# Altium PCB PCB_Lampda_2024-07-19.pcbdoc (part 2 of 2)
Units mil, origin at the board's own origin, x right, y up, seen from the top; angles counter-clockwise.
Board outline 2732.28 x 2742.31 mil, 2 copper layers (Top Layer, Bottom Layer); 110 components, 107 nets, 461 pads, 275 vias.
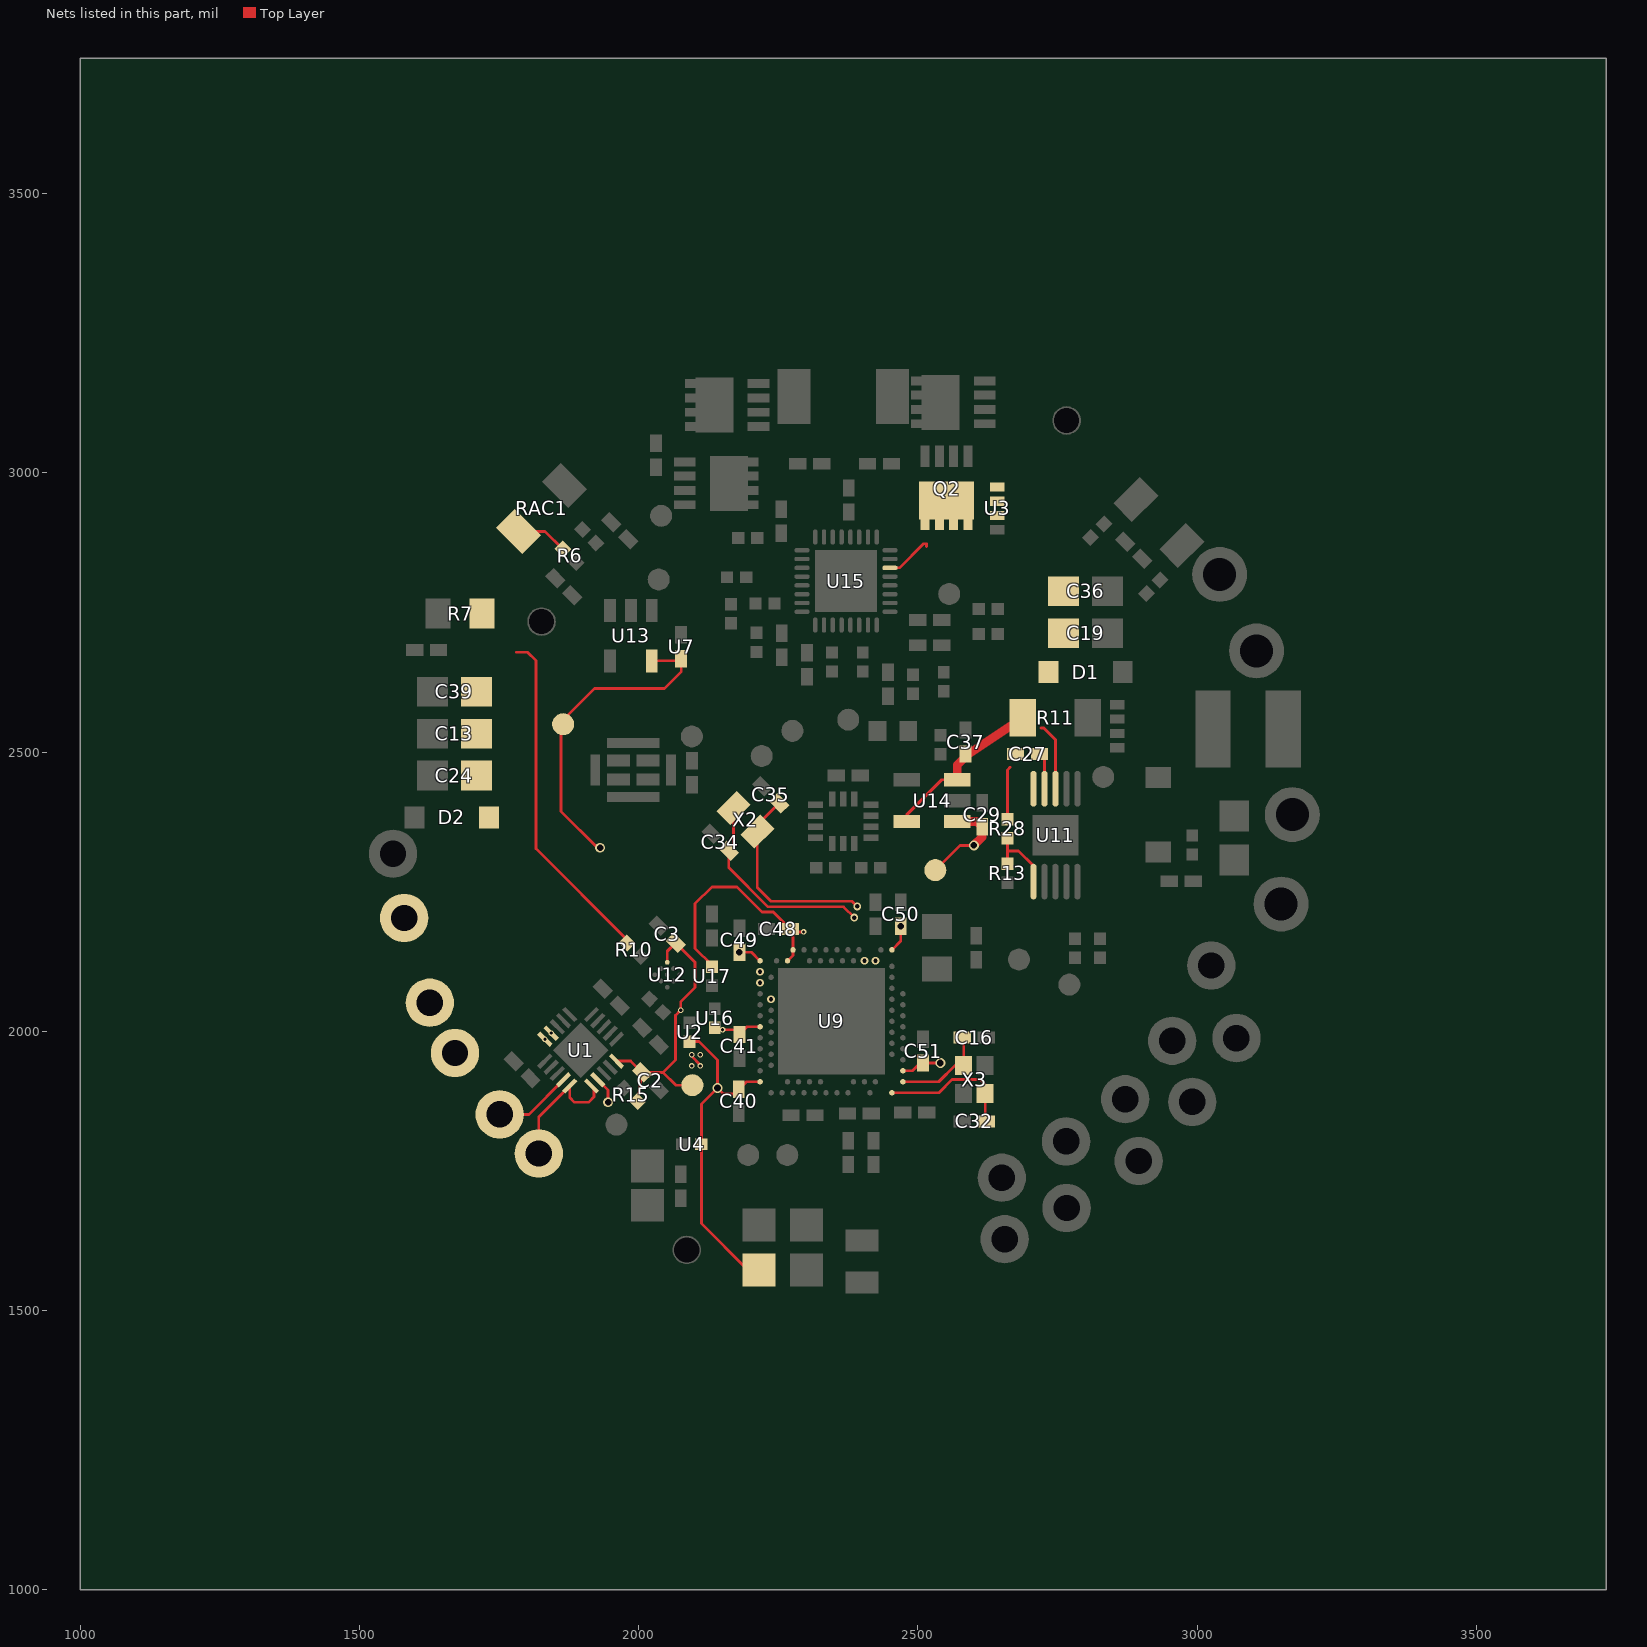
[diagram p2: the nets of this part, all layers, seen from the top]

## Via types
v1: diameter 17.72, hole 11.81, Top Layer to Bottom Layer, tented both sides, 203 vias
v2: diameter 13.78, hole 7.87, Top Layer to Bottom Layer, tented both sides, 35 vias
v3: diameter 9.84, hole 5.91, Top Layer to Bottom Layer, tented both sides, 34 vias
v4: diameter 98.43, hole 59.06, Top Layer to Bottom Layer, tented both sides, 2 vias
v5: diameter 9.84, hole 7.87, Top Layer to Bottom Layer, tented both sides, 1 vias

## Nets (pads, with @x,y where several pads share a name; then routed paths per layer and width w, separated by ;. In a path a pad name is that pad's centre, name@x,y a point inside that pad or via, vN(x,y) a via of type N, cw(c..) or ccw(c..) an arc to the next point about the centre after c; other vN are vias at no path point) (continued)
USB_V33: C2.2 C3.1 pad.1@2096.08,1903.58 R15.2 U1.10 U9.AC9 U12.A3 | length 687.8
  Top Layer w5: U1.10@1960.16,1946.68 1985.63,1946.68 C2.2@2005.97,1926.35 ; R15.2@1998.19,1874.12 C2.2@2005.97,1926.35 ; U12.A3@2051.11,2123.47 2051.11,2143.27 C3.1@2066.25,2158.4 2101.07,2123.58 2101.07,2078.58 2075.19,2052.7 v3(2075.19,2037.9) ; v3(2075.19,2037.9) 2066.07,2028.58 2066.07,1948.58 2043.64,1926.37 ; pad.1@2096.08,1903.58 2066.39,1903.58 2043.63,1926.34 ; C2.2@2005.94,1926.37 2043.64,1926.37
  Mid-Layer 2 w5: v3(2075.19,2037.9) 2195.24,2037.87 2214.54,2057.27 v2(2236.92,2057.27)
USBC_CC1: pad.@1751.14,1851.17 U1.4 U1.7 | length 399.9
  Top Layer w5: pad.@1751.14,1851.17 1803.41,1851.17 U1.4@1865.52,1913.28 ; U1.7@1926.76,1913.27 1945.19,1894.83 v1(1945.19,1872.9)
  Mid-Layer 1 w5: pad.@1751.14,1851.17 1752.87,1852.9 1940.19,1852.9 1945.19,1857.9 v1(1945.19,1872.9)
USBC_CC2: pad.@1821.14,1781.17 U1.5 U1.6 | length 237.2
  Top Layer w5: pad.@1821.14,1781.17 1821.14,1846.63 1876.65,1902.14 1876.64,1881.47 1885.14,1872.87 1910.24,1872.87 1920.24,1882.87 1920.24,1897.57 U1.6@1915.64,1902.17
USBC_D+: pad.@1626.14,2051.17 U1.19 U9.AD6 | length 735.6
  Mid-Layer 1 w5: pad.@1626.14,2051.17 1788.87,2051.17 v3(1843.24,1996.8) ; v3(1843.24,1996.8) 1917.14,1922.87 2090.24,1922.87 2095.24,1927.87 v3(2095.19,1937.9) ; v3(2110.24,1957.87) 2110.24,1982.87 2214.04,2086.77 v2(2217.24,2086.8)
  Mid-Layer 2 w5: v3(2095.19,1937.9) 2095.19,1940.42 2110.24,1955.47 v3(2110.24,1957.87)
USBC_D-: pad.@1671.14,1961.17 U1.20 U9.AD4 | length 791.7
  Top Layer w5: v3(2095.19,1957.9) 2095.19,1954.88 2110.19,1939.88 v3(2110.19,1937.9)
  Mid-Layer 1 w5: pad.@1671.14,1961.17 1671.14,1998.85 1705.19,2032.9 1784.87,2032.9 v3(1832.11,1985.66) 1909.87,1907.9 2095.19,1907.9 2110.19,1922.9 v3(2110.19,1937.9) ; v3(2095.19,1957.9) 2095.24,1984.47 2192.54,2081.77 2201.07,2098.58 2206.07,2103.58 v2(2217.24,2106.48)
USBC_PVBUS: C13.2 C24.2 C39.2 D2.1 pad.@1580.19,2202.9 R6.2 R7.1 R10.1 RAC1.1 | length 706.4
  Top Layer w5: 1781.07,2678.58 1801.07,2678.58 1816.07,2663.58 1816.07,2327.02 1979.09,2164 R10.1@1979.09,2158.22 ; RAC1.1@1784.97,2895.01 1832.31,2895 R6.2@1864.09,2863.22
UVLO: R13.2 R28.2 U11.1 | length 131.7
  Top Layer w5: R13.2@2660.19,2299.94 R28.2@2660.19,2345.86 ; 2660.19,2322.9 2680.19,2322.9 2706.77,2296.32 U11.1@2706.77,2268.1
V33: C29.2 C40.1 C41.2 C48.1 C50.2 C51.1 pad.1@2215.19,1572.9 pad.1@2531.07,2288.58 U2.2 U4.2 U9.A22 U9.AD14 U9.AD23 U9.B1 U9.W1 U9.Y2 U14.1 U16.2 U17.1 | length 2624.1
  Top Layer w5: U2.2@2091.07,1981.54 2108.11,1981.54 2141.07,1948.58 v1(2141.07,1898.58) ; U4.2@2112.23,1797.9 2112.24,1655.87 2195.24,1572.87 pad.1@2215.19,1572.9 ; U4.2@2112.23,1797.9 2112.23,1869.74 v1(2141.07,1898.58) ; U17.1@2131.04,2115.57 2131.04,2118.57 2101.04,2148.57 2101.04,2228.57 2131.04,2258.57 2176.04,2258.57 2221.04,2213.57 2240.94,2213.57 C48.1@2271.65,2182.9 2276.24,2182.87 2276.24,2154.97 U9.W1@2276.24,2145.87 ; U16.2@2136.07,2006.54 2139.71,2002.9 v3(2150.19,2002.9) ; v3(2150.19,2002.9) 2180.24,2002.87 C41.2@2180.19,1994.36 ; C40.1@2179.24,1896.09 2179.24,1887.87 2151.78,1887.87 v1(2141.07,1898.58) ; C40.1@2179.24,1896.09 2192.78,1909.63 U9.AD23@2217.24,1909.63 ; C41.2@2180.19,1994.36 2193.89,2008.06 U9.AD14@2217.24,2008.06 ; U9.Y2@2266.45,2126.17 2276.29,2136.01 U9.W1@2276.29,2145.85 ; C48.1@2271.65,2182.9 2276.65,2177.9 v3(2295.19,2177.9) ; U9.B1@2453.46,2145.85 2469.24,2161.63 v1(2469.24,2188.17) ; U9.A22@2473.14,1929.32 2490.19,1929.32 2504.04,1943.17 C51.1@2509.24,1943.17 v1(2540.19,1943.17) ; pad.1@2531.07,2288.58 2575.39,2332.9 v1(2600.19,2332.9)
  Top Layer w15.75: U14.1@2570.47,2375.5 2606.13,2375.5 C29.2@2615.19,2366.44 2615.19,2347.9 v1(2600.19,2332.9)
  Mid-Layer 1 w5: v1@2141.04,1898.57 2146.04,1903.57 2146.07,1998.58 v3(2150.19,2002.9)
  Mid-Layer 2 w5: v3(2295.19,2177.9) 2305.46,2188.17 v1(2469.24,2188.17)
  Mid-Layer 2 w15.75: v1(2141.07,1898.58) 2171.78,1867.87 2464.94,1867.87 v1(2540.19,1943.17) ; v1(2540.19,1943.17) 2540.19,2117.22 v1(2469.24,2188.17) v1(2600.19,2332.9)
VBUS5: C49.2 pad.1@1864.76,2549.82 U7.2 U9.AD2 U13.5 | length 961.4
  Top Layer w5: v1@1931.04,2328.57 1926.04,2328.57 1861.04,2393.57 1861.04,2553.57 1921.04,2613.57 2046.07,2613.57 2076.07,2643.58 U7.2@2076.07,2667.12 2072.36,2663.4 U13.5@2023.47,2663.4 ; v1(2180.19,2141.44) 2201.97,2141.44 U9.AD2@2217.24,2126.17
  Mid-Layer 1 w5: v1@1931.04,2328.57 1931.07,2318.58 2113.14,2141.47 v1@2180.24,2141.47
  other v1: 1931.07,2328.58
VCC: C27.1 U11.9 | length 65.6
  Top Layer w5: C27.1@2717.6,2496.17 2726.46,2487.31 U11.9@2726.45,2434.24
VSYS: C19.2 C27.2 C36.2 C37.2 D1.1 Q2.5 Q2.6 Q2.7 Q2.8 R11.1 R28.1 U3.1 U3.2 U3.3 U11.8 U11.10 U14.3 U14.5 U15.22 | length 605.6
  Top Layer w5: U15.22@2449.84,2829.77 2467.04,2829.77 2510.24,2872.87 2515.24,2872.87 2515.24,2867.87 ; U14.5@2479.91,2375.5 2479.94,2387.67 2542.64,2450.27 U14.3@2570.44,2450.27 ; R28.1@2660.19,2379.94 2660.19,2467.9 2665.19,2472.9 ; 2720.24,2542.87 2725.24,2542.87 2736.04,2532.07 2746.14,2521.97 U11.8@2746.14,2434.27
  Top Layer w15.75: U14.3@2570.47,2450.31 2570.47,2476.72 2585.19,2491.44 2589.92,2496.17 R11.1@2687.92,2561.17
XC1: C32.1 U9.B24 X3.1 | length 247.1
  Top Layer w5: U9.B24@2453.46,1889.95 2537.45,1889.95 2561.07,1913.58 2601.07,1913.58 ; 2601.04,1913.57 2611.04,1913.57 2620.24,1904.37 X3.1@2620.24,1888.47 ; X3.1@2620.29,1888.46 2620.28,1840.83 C32.1@2622.53,1838.58
XC2: C16.2 U9.A23 X3.3 | length 171.6
  Top Layer w5: U9.A23@2473.14,1909.63 2537.13,1909.63 2566.19,1938.7 X3.3@2581.86,1938.69 2581.86,1986.33 C16.2@2579.61,1988.58
XL1: C35.2 U9.D2 X2.2 | length 471
  Top Layer w5: X2.2@2212.24,2357.37 2212.24,2257.37 2236.74,2232.87 2381.74,2232.87 v2@2391.04,2223.57 ; X2.2@2212.29,2357.36 2212.29,2369.46 C35.2@2251.25,2408.4
  Mid-Layer 1 w5: v2(2391.07,2223.58) 2423.93,2190.72 v2(2423.93,2126.17)
XL2: C34.2 U9.F2 X2.1 | length 456.9
  Top Layer w5: C34.2@2161.25,2323.4 2161.24,2293.27 2231.64,2222.87 2366.74,2222.87 v2@2386.04,2203.57 ; C34.2@2161.25,2323.4 2169.85,2332.02 X2.1@2169.86,2399.8
  Mid-Layer 1 w5: v2(2386.07,2203.58) 2404.24,2185.41 v2(2404.24,2126.17)
pads on no net: ANT1.2 U1.1 U1.2 U1.14 U1.15 U6.4 U6.9 U6.10 U6.11 U9.A14 U9.A18 U9.AB2 U9.AC15 U9.AC17 U9.AC19 U9.AC21 U9.AD18 U9.G1 U9.J1 U9.J24 U9.K2 U9.L1 U9.L24 U9.N1 U9.P23 U9.R24 U9.T23 U9.U24 U9.V23 U9.Y23 U11.2 U13.4 U14.4

## Keep-outs
Keep-Out Layer:
  circle w10: c2366.14,2376.17 r866.14

## Other copper
Top Layer:
  drawing of 475 lines, arcs and shapes, not listed
Mid-Layer 1:
  region net GND: 2970.19,2992.9 2900.19,3052.9 2800.19,3122.9 2740.19,3152.9 2690.19,3172.9 2675.19,3162.9 2670.19,3152.9 2660.19,3147.9 2650.19,3152.9 2645.19,3162.9 2645.19,3182.9 2640.19,3192.9 2555.19,3217.9 2455.19,3232.9 2466.07,3008.58 2460.19,2917.9 2645.19,2912.9 2655.19,2907.9 2660.19,2897.9 2680.19,2882.9 2810.19,2857.9 2816.07,2863.58 2826.07,2863.58 2836.07,2853.58 2836.07,2843.58 2831.07,2838.58 2826.07,2833.58 2811.07,2833.58 2745.19,2837.9 2670.19,2792.9 2690.19,2767.9 2690.19,2717.9 2660.19,2697.9 2661.07,2643.58 2636.07,2618.58 2635.19,2417.9 2635.19,2362.9 2855.19,2517.9 2855.19,2792.9 2865.19,2807.9 2866.07,2818.58 2876.07,2823.58 2885.19,2822.9 2891.07,2818.58 2895.19,2812.9 2896.07,2803.58 2891.07,2793.58 2960.19,2652.9 2965.19,2602.9 3190.19,2632.9 3145.19,2747.9 3110.19,2752.9 3036.07,2728.58 3010.19,2732.9 2980.19,2772.9 2965.19,2802.9 2970.19,2847.9 3020.19,2892.9 3030.19,2922.9
  region net GND: 2475.19,3112.9 2510.19,3147.9 2695.19,3147.9 2660.19,3112.9 2475.19,3112.9
  region net GND: 2505.19,2767.9 2510.19,2727.9 2380.19,2742.9 2275.19,2742.9 2275.19,2807.9 2260.19,2827.9 2245.19,2827.9 2235.19,2822.9 2220.19,2822.9 2215.19,2817.9 2215.19,2807.9 2220.19,2802.9 2220.19,2792.9 2205.19,2777.9 2205.19,2737.9 2205.19,2552.9 2186.07,2533.58 2161.07,2533.58 2136.07,2508.58 1971.07,2508.58 1956.07,2528.58 1956.07,2548.58 1981.07,2568.58 2081.07,2568.58 2106.07,2593.58 2105.19,2787.9 2116.07,2798.58 2131.07,2798.58 2141.07,2808.58 2141.07,2823.58 2141.07,2838.58 2155.19,2852.9 2225.19,2922.9 2310.19,2922.9 2315.19,2917.9 2315.19,2907.9 2316.07,2903.58 2321.07,2898.58 2325.19,2897.9 2340.19,2897.9 2350.19,2887.9 2350.19,2877.9 2360.19,2872.9 2365.19,2872.9 2380.19,2882.9 2420.19,2882.9 2430.19,2872.9 2430.19,2842.9 2440.19,2832.9 2450.19,2832.9 2461.07,2838.58 2475.19,2862.9 2500.19,2862.9 2515.19,2852.9 2560.19,2817.9 2590.19,2777.9 2565.19,2777.9 2520.19,2777.9 2520.19,2812.9 2515.19,2822.9 2505.19,2827.9 2495.19,2822.9 2491.07,2813.58 2491.07,2783.58 2495.19,2772.9 2505.19,2767.9
  region net GND: 2620.19,2917.9 2530.19,2912.9 2465.19,2912.9 2460.19,2917.9 2461.07,2983.58 2461.07,3008.58 2456.07,3013.58 2350.19,3012.9 2236.07,3153.58 2236.07,3163.58 2231.07,3173.58 2220.19,3177.9 2205.19,3177.9 2196.07,3173.58 2190.19,3162.9 2190.19,3152.9 2070.19,3187.9 2140.19,3207.9 2185.19,3217.9 2235.19,3227.9 2340.19,3237.9 2455.19,3232.9 2475.19,3112.9 2465.19,2952.9 2620.19,2917.9
  region net GND: 2245.19,2572.9 2245.19,2622.9 2340.19,2717.9 2385.19,2717.9 2395.19,2727.9 2385.19,2737.9 2365.19,2747.9 2495.19,2737.9 2505.19,2767.9 2520.19,2777.9 2560.19,2817.9 2595.19,2777.9 2660.19,2777.9 2675.19,2762.9 2675.19,2727.9 2625.19,2692.9 2626.07,2633.58 2505.19,2532.9 2480.19,2512.9 2315.19,2512.9 2301.07,2518.58 2291.07,2528.58 2291.07,2543.58 2306.07,2558.58 2311.07,2558.58 2320.19,2562.9 2326.07,2568.58 2325.19,2577.9 2321.07,2583.58 2310.19,2587.9 2301.07,2583.58 2296.07,2578.58 2296.07,2568.58 2281.07,2553.58 2266.07,2553.58
  region net GND: 2031.07,2923.58 2026.07,2938.58 2031.07,2948.58 2041.07,2953.58 2057.69,2950.4 2060.19,2942.9 2060.19,2912.9 2110.19,2812.9 2110.19,2827.9 2130.19,2847.9 2220.19,2937.9 2325.19,2937.9 2350.19,2957.9 2350.19,3002.9 2360.19,3012.9 2332.69,3050.4 2236.07,3153.58 2227.69,3140.4 2202.69,3140.4 2192.69,3150.4 2187.69,3160.4 2072.69,3185.4 1992.69,3150.4 1905.19,3102.9 1830.19,3047.9 1745.19,2972.9 1640.19,2842.9 1590.19,2747.9 1535.19,2602.9 1510.19,2482.9 1505.19,2302.9 1510.19,2277.9 1545.19,2267.9 1600.19,2277.9 1875.19,2317.9 1910.19,2347.9 1910.19,2542.9 1945.19,2577.9 1956.07,2583.58 1985.19,2582.9 2075.19,2582.9 2090.19,2597.9 2090.19,2787.9
  region net GND: 2090.19,2787.9 2020.19,2837.9 2025.19,2937.9 2040.19,2922.9 2056.07,2923.58 2060.19,2942.9 2110.19,2847.9 2111.07,2833.58 2111.07,2828.58 2110.19,2807.9
  region net GND: 3175.19,2157.9 3135.19,2147.9 3080.19,2177.9 3041.07,2228.58 2976.07,2228.58 2936.07,2193.58 2665.19,2197.9 2635.19,2232.9 2635.19,2282.9 2635.19,2417.9 2865.19,2812.9 2870.19,2797.9 2880.19,2792.9 2886.07,2793.58 2890.19,2797.9 3190.19,2632.9 3220.19,2482.9 3200.19,2457.9 3130.19,2452.9 3100.19,2412.9 3105.19,2362.9 3120.19,2327.9 3160.19,2297.9 3200.19,2297.9 3220.19,2277.9 3210.19,2187.9 3205.19,2162.9
  region net GND: 2080.19,2397.9 2175.19,2492.9 2220.19,2492.9 2240.19,2507.9 2250.19,2507.9 2260.19,2487.9 2260.19,2167.9 2280.19,2142.9 2290.19,2132.9 2290.19,2122.9 2305.19,2112.9 2415.19,2112.9 2415.19,1922.9 2255.19,1922.9 2255.19,2022.9 2255.19,2102.9 2235.19,2112.9 2230.19,2112.9 2220.19,2122.9 2190.19,2127.9 2195.19,2142.9 2190.19,2152.9 2180.19,2157.9 2170.19,2152.9 2120.19,2152.9 2060.19,2212.9 1956.07,2313.58 1956.07,2358.58 1966.07,2368.58 1986.07,2368.58 1996.07,2378.58 2016.07,2398.58 2050.19,2397.9
  region net GND: 2415.19,1932.9 2260.19,1932.9 2150.19,1822.9 2091.07,1823.58 2086.07,1818.58 2075.19,1817.9 2061.07,1823.58 2056.07,1833.58 2051.07,1838.58 2041.07,1843.58 2031.07,1848.58 2021.07,1858.58 1960.19,1857.9 1945.19,1842.9 1865.19,1842.9 1855.19,1827.9 1875.19,1797.9 1880.19,1757.9 1840.19,1717.9 1845.19,1687.9 1940.19,1627.9 2065.19,1567.9 2185.19,1532.9 2275.19,1517.9 2295.19,1537.9 2295.19,1712.9 2325.19,1737.9 2465.19,1737.9 2485.19,1717.9 2485.19,1547.9 2505.19,1527.9 2590.19,1542.9 2615.19,1552.9 2615.19,1562.9 2605.19,1572.9 2595.19,1622.9 2600.19,1682.9 2595.19,1692.9 2445.19,1842.9 2445.19,1862.9 2431.07,1873.58 2411.07,1873.58 2400.19,1882.9 2400.19,1892.9 2406.07,1903.58 2415.19,1907.9
  region net GND: 2745.19,2047.9 2736.07,2053.58 2736.07,2058.58 2800.19,2122.9 2811.07,2123.58 2815.19,2132.9 2815.19,2142.9 2806.07,2153.58 2796.07,2153.58 2786.07,2148.58 2780.19,2132.9 2715.19,2067.9 2500.19,2067.9 2490.19,2077.9 2490.19,2187.9 2485.19,2197.9 2475.19,2202.9 2465.19,2202.9 2455.19,2197.9 2435.19,2197.9 2410.19,2222.9 2371.07,2263.58 2346.07,2263.58 2335.19,2277.9 2335.19,2457.9 2350.19,2472.9 2405.19,2472.9 2420.19,2487.9 2420.19,2502.9 2405.19,2517.9 2485.19,2517.9 2595.19,2622.9 2595.19,2357.9 2575.19,2337.9 2575.19,2267.9 2651.07,2173.58 2815.19,2172.9 2836.07,2173.58 2941.07,2173.58 2956.07,2163.58 2976.07,2163.58 2981.07,2168.58 3046.07,2168.58 3066.07,2153.58 3081.07,2128.58 3081.07,2103.58 3061.07,2078.58 3031.07,2063.58 2970.19,2062.9 2955.19,2047.9 2745.19,2047.9
  region net GND: 2430.19,2112.9 2255.19,2112.9 2390.19,2047.9 2440.19,2097.9 2441.07,2103.58 2450.19,2112.9 2465.19,2112.9 2490.19,2077.9 2515.19,2132.9 2495.19,2187.9
  region net GND: 2750.19,2812.9 2811.07,2833.58 2806.07,2838.58 2805.19,2847.9 2806.07,2853.58 2815.19,2862.9 2660.19,2897.9 2650.19,2882.9 2635.19,2882.9 2625.19,2892.9 2625.19,2907.9 2640.19,2917.9 2615.19,2927.9 2460.19,2917.9 2461.07,2903.58 2565.19,2832.9 2600.19,2792.9 2670.19,2792.9
  region net USBC_D+: 1654.78,2018.69 1654.78,2083.65 1685.1,2053.67 1685.1,2048.67
  region net USBC_D-: 1710.92,1978.29 1649.19,1998.5 1686.83,2018.08 1692.15,2016.33
  region net USBC_CC1: 1780.73,1819.55 1778.82,1884.48 1810,1855.4 1810.15,1850.4
  region net AIN4: 2957.9,2026.13 2911.97,1980.19 2911.73,2022.83 2915.27,2026.36
  region net AIN1: 2980.81,1915.65 2950.61,1858.14 2947.65,1893.19 2950.28,1898.19
  region net P1.13: 2722.11,1798.52 2766.22,1846.2 2723.61,1844.78 2720.22,1841.11
  region net P1.14: 2892.7,1811.14 2852.61,1760.03 2847.25,1802.31 2850.36,1806.28
  region net P1.12: 2781.62,1724 2724.03,1693.95 2736.48,1734.64 2741.12,1737.06
  region net P1.11: 2668.2,1669.21 2612.58,1635.65 2622.52,1677.05 2626.93,1679.71
  region net P1.10: 2652.9,1781.13 2606.97,1735.19 2606.73,1777.83 2610.27,1781.36
  region net USBC_D+: 1842.92,1991.89 1848.15,1997.1 1849.74,1993.81 1846.19,1990.29
  region net USBC_D+: 1838.33,1996.49 1843.55,2001.71 1840.27,2003.31 1836.73,1999.77
  region net USBC_D-: 1831.8,1980.75 1837.02,1985.97 1838.62,1982.69 1835.08,1979.16
  region net USBC_D-: 1827.2,1985.35 1832.42,1990.57 1829.14,1992.17 1825.6,1988.63
  region net USBC_D+: 2216.02,2080.02 2210.67,2088.86 2207.88,2084.15 2210.55,2079.74
  region net USBC_D-: 2214.13,2100.33 2211.53,2110.34 2207.53,2106.54 2208.79,2101.7
  region net USBC_D-: 2091.52,1961.19 2098.91,1961.13 2097.74,1964.59 2092.74,1964.62
  region net USBC_D-: 2106.5,1934.65 2113.88,1934.65 2112.69,1931.2 2107.69,1931.2
  region net USBC_D+: 2106.55,1961.13 2113.93,1961.13 2112.74,1964.57 2107.74,1964.57
  region net USBC_D+: 2091.52,1934.62 2098.91,1934.67 2097.74,1931.22 2092.74,1931.18
  region net I2CM_CLK: 2066.31,2109.48 2064.57,2116.66 2068.2,2116.31 2069.38,2111.45
  region net I2CM_SDA: 2073.1,2096.26 2078.32,2101.48 2079.92,2098.2 2076.38,2094.67
  region net IMU_PWR: 2395.75,2496.74 2386.35,2487.35 2384.9,2494.67 2388.44,2498.2
  region net IMU_PWR: 2323.87,2132.87 2332.35,2126.96 2332.24,2131.47 2328.14,2134.33
  region net IMU_CLK: 2340.02,2130.73 2350.36,2130.73 2347.69,2135.55 2342.69,2135.55
  region net IMU_SDA: 2379.39,2130.73 2389.73,2130.73 2387.06,2135.55 2382.06,2135.55
  region net IMU_SDA: 2361.5,2249.65 2368.88,2249.65 2367.69,2246.2 2362.69,2246.2
  region net IMU_CLK: 2341.5,2249.65 2348.88,2249.65 2347.69,2246.2 2342.69,2246.2
  region net IMU_PWR: 2324.88,2247.99 2330.1,2253.21 2331.7,2249.93 2328.16,2246.4
  region net IMU_PWR: 2321.52,2256.19 2328.91,2256.13 2327.74,2259.59 2322.74,2259.62
  region net XL1: 2390.64,2216.71 2397.95,2224.01 2399.47,2218.72 2395.93,2215.18
  region net XL2: 2385.64,2196.71 2392.95,2204.01 2394.47,2198.72 2390.93,2195.18
  region net XL2: 2399.07,2130.73 2409.41,2130.73 2406.74,2135.55 2401.74,2135.55
  region net XL1: 2418.76,2130.73 2429.1,2130.73 2426.43,2135.55 2421.43,2135.55
  region net V33: 2149.54,1901.18 2137.43,1906.66 2143.54,1910.7 2148.54,1908.44
  region net V33: 2145.27,2003.09 2150.62,1998 2147.89,1996.85 2144.26,2000.3
  region net I2CM_CLK: 2130.33,2067.56 2135.55,2072.78 2132.27,2074.38 2128.73,2070.84
  region net I2CM_SDA: 2131.93,2049.21 2131.93,2056.59 2128.49,2055.4 2128.49,2050.4
  region net I2CM_SDA: 2215.68,2502.7 2215.68,2513.04 2210.86,2510.37 2210.86,2505.37
  region net CH_REGN: 2132.71,2819.44 2119.43,2819.44 2123.57,2825.64 2128.57,2825.64
  region net CH_PROC_HOT: 2344.26,2723.74 2344.26,2731.12 2340.82,2729.93 2340.82,2724.93
  region net CH_REGN: 2370.28,2923.07 2370.28,2936.36 2364.08,2932.21 2364.08,2927.21
  region net DEC6: 2413.66,1896.83 2420.97,1889.52 2422.49,1894.82 2418.95,1898.35
  region net RESET: 2236.48,2011.03 2243.8,2018.33 2245.32,2013.03 2241.78,2009.5
  region net RESET: 2081.07,1839.53 2081.03,1826.24 2087.24,1830.37 2087.26,1835.37
  region net USBC_CC1: 1951.83,1867.04 1938.55,1867.04 1942.69,1860.84 1947.69,1860.84
  region net CH_INT_N: 2100.28,2060.43 2094.38,2051.95 2091.92,2056.86 2094.82,2061.03
  region net CH_INT_N: 2050.83,2096.26 2056.05,2101.48 2057.65,2098.2 2054.11,2094.67
  region net OUT_CC1: 2046.23,2079.19 2051.47,2073.99 2048.19,2072.39 2044.64,2075.91
  region net OUT_CC1: 1991.06,2064.54 1991.04,2051.25 1997.25,2055.38 1997.25,2060.38
  region net FAULT: 2210.37,1949.45 2217.65,1942.12 2212.35,1940.61 2208.83,1944.16
  region net FAULT: 2051.1,1851.23 2051.1,1864.52 2057.3,1860.37 2057.3,1855.37
  region net BAT21: 2458.02,2052.11 2458.02,2062.44 2462.84,2059.77 2462.84,2054.77
  region net BAT21: 2800.74,2129.06 2791.35,2138.46 2789.9,2131.14 2793.43,2127.61
  region net AIN4: 2458.02,2032.42 2458.02,2042.75 2462.84,2040.08 2462.84,2035.08
  region net AIN1: 2458.03,2023.06 2458,2012.72 2462.83,2015.37 2462.85,2020.37
  region net P1.14: 2459.98,1995.99 2454.85,2004.96 2460.17,2005.37 2463.03,2000.37
  region net P1.12: 2460.11,1980.34 2454.42,1971.71 2459.89,1971.24 2462.7,1975.51
  region net P1.11: 2458.62,1954.28 2448.28,1954.3 2450.94,1949.47 2455.94,1949.46
  region net P1.13: 2477.7,1982.7 2477.7,1993.04 2482.52,1990.37 2482.52,1985.37
  region net P1.10: 2467.97,1944.44 2478.31,1944.44 2475.64,1939.62 2470.64,1939.62
  region net VBUS5: 2174.35,2148.1 2174.32,2134.81 2168.12,2138.97 2168.14,2143.97
  region net DEC6: 2446.58,2097.07 2453.89,2089.77 2448.59,2088.24 2445.06,2091.78
  region net I2CM_CLK: 2204.98,2521.78 2199.46,2530.52 2196.56,2526.07 2199.72,2521.07
  region net CH_PROC_HOT: 2308.31,2207.48 2315.63,2214.78 2310.34,2216.31 2306.8,2212.78
  region net CH_EN_OTG: 2303.41,2132.62 2312.54,2127.77 2312.74,2133.13 2307.74,2135.78
  region net CH_CHARGE_OK: 2289.1,2145.42 2296.41,2152.73 2291.12,2154.26 2287.58,2150.72
  region net CH_EN_OTG: 2261.95,2799.2 2261.92,2806.58 2258.48,2805.37 2258.5,2800.37
  region net CH_CHARGE_OK: 2250.28,2818.17 2255.54,2812.99 2252.28,2811.37 2248.71,2814.88
  region net CH_SW2: 2449.38,2852.76 2445.48,2846.49 2443.18,2849.32 2445.82,2853.57
  region net CH_SW2: 2449.4,2990.37 2437.51,2996.31 2438.84,2989.69 2443.31,2987.46
  region net I2CM_CLK: 1965.75,2403.49 1970.98,2398.28 1972.57,2401.57 1969.03,2405.09
  region net I2CM_SDA: 1980.76,2388.49 1985.98,2383.27 1987.58,2386.55 1984.04,2390.09
  region net VBUS5: 1937.72,2322.73 1924.43,2322.72 1928.57,2318.58 1933.57,2318.58
Mid-Layer 2:
  region net BAT+: 3077.1,2785.35 3003.28,2785.35 3037.69,2750.9 3042.69,2750.9
  region net BAT+: 3077.1,2785.35 3003.28,2785.35 3037.69,2750.9 3042.69,2750.9
  region net V33: 2540.77,1934.33 2531.35,1943.7 2526.1,1940.17 2537.27,1929.07
  region net V33: 2546.83,1949.03 2533.55,1949.03 2532.32,1955.23 2548.06,1955.23
  region net V33: 2478.1,2188.06 2468.25,2196.97 2471.5,2202.4 2483.17,2191.83
  region net V33: 2478.08,2188.73 2468.69,2179.33 2472.2,2174.08 2483.34,2185.21
  region net V33: 2463.38,2181.53 2463.38,2194.82 2457.18,2190.67 2457.18,2185.67
  region net V33: 2294.88,2182.82 2300.1,2177.6 2301.7,2180.87 2298.16,2184.41
  region net USBC_D+: 2105.41,1956.92 2111.78,1953.2 2109.09,1950.78 2104.63,1953.39
  region net USBC_D+: 2093.59,1942.56 2100.01,1938.91 2100.76,1942.45 2096.25,1945.01
  region net I2CM_CLK: 2057.37,2111.99 2062.59,2117.22 2059.31,2118.81 2055.77,2115.27
  region net I2CM_SDA: 2070.72,2105.29 2077.83,2103.33 2077.69,2106.94 2072.69,2108.32
  region net I2S_CLK: 1961.46,2442.58 1955.35,2454.38 1951.7,2447.96 1954.11,2443.3
  region net I2S_DATA: 2010.91,2444.53 2010.91,2457.82 2004.71,2453.67 2004.71,2448.67
  region net MIC_PWR: 2022.63,2477.99 2022.63,2491.28 2028.83,2487.13 2028.83,2482.13
  region net I2S_DATA: 2236.64,2030.7 2230.12,2038.72 2228.06,2033.61 2231.21,2029.73
  region net MIC_PWR: 2221.8,1983.2 2221.8,1993.54 2226.62,1990.87 2226.62,1985.87
  region net I2S_CLK: 2212.71,1924.13 2212.66,1934.47 2207.85,1931.77 2207.87,1926.77
  region net MIC_PWR: 2101.86,2478.53 2088.57,2478.48 2092.74,2472.29 2097.74,2472.31
  region net MIC_PWR: 2089.36,2491.03 2089.3,2477.75 2083.12,2481.92 2083.14,2486.92
  region net V33: 2149.91,1899.14 2140.51,1889.74 2144.03,1884.49 2155.16,1895.62
  region net V33: 2601.23,2324.11 2591.33,2332.98 2586.28,2329.18 2598,2318.67
  region net I2CM_SDA: 2366.95,2724.16 2359.56,2724.19 2360.74,2720.74 2365.74,2720.72
  region net I2CM_CLK: 2376.5,2724.65 2383.88,2724.65 2382.69,2721.2 2377.69,2721.2
  region net I2CM_SDA: 2219.81,2514.75 2227.12,2507.44 2228.64,2512.74 2225.1,2516.27
  region net CH_BATDRV: 2642.75,2888.95 2633.36,2898.35 2631.9,2891.03 2635.44,2887.5
  region net CH_BATDRV: 2508.45,2809.21 2508.45,2816.59 2511.89,2815.4 2511.89,2810.4
  region net CH_SRP: 2508.45,2794.21 2508.45,2801.59 2511.89,2800.4 2511.89,2795.4
  region net CH_SRN: 2508.45,2779.21 2508.45,2786.59 2511.89,2785.4 2511.89,2780.4
  region net CH_SRN: 2881.62,2799.74 2872.23,2809.14 2870.77,2801.82 2874.31,2798.29
  region net CH_SRP: 2820.74,2839.06 2811.35,2848.46 2809.9,2841.14 2813.43,2837.61
  region net CH_LODRV2: 2655.22,3161.93 2655.2,3175.22 2649.01,3171.07 2649.01,3166.07
  region net CH_LODRV2: 2406.52,2916.19 2413.91,2916.13 2412.74,2919.59 2407.74,2919.62
  region net CH_HIDRV1: 2336.83,2918.76 2323.55,2918.76 2327.69,2924.96 2332.69,2924.96
  region net CH_HIDRV1: 2223.48,3160.12 2214.09,3150.72 2221.4,3149.27 2224.94,3152.8
  region net CH_VDDA: 2224.88,2807.99 2230.1,2813.21 2231.7,2809.93 2228.16,2806.4
  region net CH_VDDA: 2251.98,2766.73 2242.59,2757.33 2249.9,2755.88 2253.44,2759.41
  region net CH_VDDA: 2249.78,2772.03 2236.5,2772.03 2240.64,2778.23 2245.64,2778.23
  region net CH_LODRV1: 2360.01,2881.22 2360.01,2888.6 2356.57,2887.41 2356.57,2882.41
  region net CH_LODRV1: 2053.8,2935.84 2042.07,2929.61 2048.53,2926.02 2053.15,2928.48
  region net CH_VDDA: 2646.62,2692.42 2637.23,2683.03 2635.77,2690.34 2639.31,2693.88
  region net OUT_CC2: 2023.96,2101.48 2029.18,2096.26 2025.9,2094.67 2022.36,2098.2
  region net OUT_CC2: 2021.83,2033.76 2008.55,2033.76 2012.69,2039.96 2017.69,2039.96
  region net BAT+: 2974.91,2183.03 2965.51,2192.42 2972.83,2193.88 2976.36,2190.34
  region net USB_V33: 2232.36,2052.11 2232.36,2062.44 2227.54,2059.77 2227.54,2054.77
  region net USB_V33: 2078.46,2041.58 2078.43,2034.2 2081.88,2035.37 2081.9,2040.37
  region net CH_INT_N: 2109.91,2018.03 2100.51,2027.42 2107.83,2028.88 2111.36,2025.34
  region net CH_INT_N: 2205.63,2022.74 2205.63,2033.07 2200.81,2030.4 2200.81,2025.4
  region net DECUSB: 2231.75,2101.2 2242.09,2101.2 2239.42,2106.02 2234.42,2106.02
  region net DECUSB: 2184.91,2103.03 2175.51,2112.42 2182.83,2113.88 2186.36,2110.34
  region net I2CM_CLK: 2309.76,2579.78 2317.07,2572.47 2318.59,2577.77 2315.06,2581.3
  region net I2CM_CLK: 1962.38,2395.33 1969.76,2395.33 1968.57,2391.88 1963.57,2391.88
  region net I2CM_SDA: 1984.3,2379.87 1976.98,2380.84 1977.69,2377.27 1982.69,2376.61
Bottom Layer:
  region net GND: 1510.19,2277.9 1505.19,2322.9 1510.19,2462.9 1535.19,2607.9 1610.19,2797.9 1735.19,2962.9 1850.19,3062.9 2026.07,2938.58 2031.07,2928.58 2040.19,2922.9 2056.07,2923.58 2061.07,2933.58 2060.19,2942.9 2056.07,2953.58 1945.19,3127.9 2050.19,3177.9 2080.19,3192.9 2160.19,3212.9 2210.19,3222.9 2205.19,3177.9 2196.07,3173.58 2190.19,3162.9 2190.19,3152.9 2201.07,3143.58 2211.07,3138.58 2220.19,3077.9 2220.19,2937.9 2110.19,2827.9 2110.19,2807.9 2090.19,2787.9 2090.19,2597.9 2075.19,2582.9 1956.07,2583.58 1945.19,2577.9 1910.19,2542.9 1910.19,2347.9 1875.19,2317.9 1545.19,2267.9
  region net GND: 1850.19,3062.9 1895.19,3097.9 1945.19,3127.9 2020.19,3027.9 2045.19,2967.9 2066.07,2948.58 2041.07,2953.58 2031.07,2948.58 2026.07,2938.58 2031.07,2928.58
  region net GND: 2350.19,2957.9 2325.19,2937.9 2220.19,2937.9 2211.07,3138.58 2221.07,3138.58 2231.07,3143.58 2236.07,3153.58 2236.07,3163.58 2231.07,3173.58 2220.19,3177.9 2195.19,3177.9 2210.19,3222.9 2275.19,3232.9 2370.19,3237.9 2490.19,3227.9 2570.19,3212.9 2640.19,3192.9 2645.19,3182.9 2645.19,3162.9 2650.19,3152.9 2660.19,3147.9 2670.19,3152.9 2675.19,3162.9 2690.19,3172.9 2760.19,3147.9 2855.19,3087.9 2915.19,3037.9 3020.19,2932.9 3015.19,2892.9 2980.19,2852.9 2826.07,2863.58 2816.07,2863.58 2805.19,2857.9 2680.19,2882.9 2670.19,2892.9 2656.07,2908.58 2645.19,2912.9 2630.19,2912.9 2620.19,2902.9 2620.19,2882.9 2620.19,2827.9 2555.19,2832.9 2460.19,2902.9 2460.19,2982.9 2460.19,3002.9 2456.07,3013.58 2445.19,3012.9 2360.19,3012.9 2350.19,3002.9
  region net GND: 161 vertices and 0 holes, not listed, extent 1635.19,1848.58 2495.19,2922.9
  region net GND: 2360.19,2997.9 2370.19,3002.9 2420.19,3002.9 2425.19,2992.9 2436.07,2983.58 2446.07,2983.58 2451.07,2978.58 2450.19,2862.9 2435.19,2852.9 2405.19,2867.9 2420.19,2877.9 2420.19,2917.9 2415.19,2922.9 2405.19,2947.9 2370.19,2947.9 2360.19,2957.9
  region net GND: 1950.19,2057.9 1945.19,2047.9 1960.19,2032.9 1990.19,2032.9 2011.07,2013.58 2026.07,2013.58 2040.19,2017.9 1940.19,1962.9 1935.19,1882.9 1930.19,1877.9 1925.19,1812.9 1850.19,1832.9 1805.19,1892.9 1821.07,1973.58 1846.07,1973.58 1856.07,1983.58 1861.07,1998.58 1910.19,2047.9
  region net GND: 2485.19,1897.9 2485.19,2097.9 2550.19,2087.9 2560.19,2037.9 2551.07,1958.58 2536.07,1958.58 2526.07,1948.58 2526.07,1938.58 2536.07,1928.58 2546.07,1928.58 2655.19,1982.9 2685.19,1797.9 2630.19,1802.9 2595.19,1782.9 2580.19,1737.9 2600.19,1682.9 2595.19,1617.9 2605.19,1572.9 2615.19,1562.9 2615.19,1552.9 2585.19,1542.9 2505.19,1527.9 2485.19,1547.9 2485.19,1717.9 2465.19,1737.9 2325.19,1737.9 2295.19,1712.9 2295.19,1537.9 2275.19,1517.9 2180.19,1532.9 2055.19,1572.9 1940.19,1622.9 1860.19,1677.9 1845.19,1687.9 1840.19,1717.9 1880.19,1757.9 1875.19,1797.9 1850.19,1832.9 1925.19,1867.9 1940.19,1857.9 2031.07,1848.58 2041.07,1843.58 2051.07,1838.58 2056.07,1833.58 2061.07,1823.58 2071.07,1818.58 2086.07,1818.58 2091.07,1833.58 2086.07,1843.58 2075.19,1847.9 2060.19,1857.9 2056.07,1868.58 2090.19,1927.9 2115.19,1927.9 2120.19,1932.9 2120.19,1962.9 2110.19,1972.9 2080.19,1972.9 2080.19,1992.9 2155.19,1992.9 2160.19,1997.9 2160.19,2002.9 2155.19,2012.9 2140.19,2012.9 2135.19,2017.9 2135.19,2027.9 2140.19,2037.9 2145.19,2042.9 2150.19,2052.9 2150.19,2062.9 2145.19,2077.9 2191.07,2083.58 2200.19,2082.9 2201.07,2038.58 2196.07,2028.58 2200.19,2017.9 2200.19,1942.9 2141.07,1913.58 2126.07,1908.58 2126.07,1898.58 2131.07,1883.58 2146.07,1883.58 2156.07,1888.58 2160.19,1902.9 2190.19,1922.9 2225.19,1877.9 2465.19,1877.9
  region net GND: 2685.19,1797.9 2550.19,1932.9 2555.19,1942.9 2551.07,1953.58 2485.19,2067.9 2490.19,2197.9 2480.19,2207.9 2465.19,2207.9 2455.19,2197.9 2435.19,2197.9 2370.19,2262.9 2320.19,2262.9 2305.19,2247.9 2265.19,2372.9 2225.19,2437.9 2230.19,2492.9 2240.19,2502.9 2240.19,2512.9 2270.19,2572.9 2296.07,2588.58 2311.07,2588.58 2301.07,2583.58 2296.07,2578.58 2296.07,2568.58 2306.07,2558.58 2316.07,2558.58 2300.19,2547.9 2390.19,2512.9 2381.07,2498.58 2381.07,2483.58 2386.07,2473.58 2401.07,2473.58 2406.07,2478.58 2410.19,2487.9 2410.19,2497.9 2400.19,2507.9 2415.19,2512.9 2595.19,2617.9 2595.19,2357.9 2585.19,2347.9 2576.07,2338.58 2575.19,2267.9 2651.07,2173.58 2815.19,2172.9 2796.07,2153.58 2786.07,2148.58 2781.07,2133.58 2786.07,2123.58 2795.19,2122.9 2805.19,2122.9 2811.07,2123.58 2815.19,2132.9 2816.07,2143.58 2806.07,2153.58 2820.19,2172.9 2941.07,2173.58 2956.07,2163.58 2976.07,2163.58 2981.07,2168.58 3046.07,2168.58 3066.07,2153.58 3081.07,2128.58 3081.07,2103.58 3061.07,2078.58 3031.07,2063.58 2970.19,2062.9 2950.19,2042.9 2900.19,2022.9 2890.19,1972.9 2875.19,1947.9 2825.19,1932.9 2800.19,1897.9 2790.19,1862.9 2750.19,1862.9 2715.19,1837.9 2690.19,1822.9 2685.19,1797.9
  region net GND: 2381.07,2503.58 2375.19,2662.9 2400.19,2717.9 2410.19,2727.9 2410.19,2737.9 2395.19,2747.9 2495.19,2772.9 2505.19,2767.9 2515.19,2772.9 2520.19,2777.9 2520.19,2807.9 2520.19,2812.9 2515.19,2822.9 2505.19,2827.9 2495.19,2822.9 2440.19,2832.9 2451.07,2833.58 2461.07,2838.58 2475.19,2862.9 2500.19,2862.9 2515.19,2852.9 2560.19,2817.9 2595.19,2777.9 2660.19,2777.9 2675.19,2762.9 2675.19,2727.9 2625.19,2692.9 2626.07,2633.58 2475.19,2507.9 2411.07,2503.58
  region net GND: 3220.19,2277.9 3200.19,2297.9 3160.19,2297.9 3120.19,2327.9 3095.19,2377.9 3095.19,2417.9 3130.19,2457.9 3200.19,2462.9 3220.19,2492.9 3205.19,2567.9 3175.19,2667.9 3145.19,2747.9 3110.19,2752.9 3050.19,2722.9 3010.19,2732.9 2985.19,2762.9 2965.19,2802.9 2970.19,2847.9 2820.19,2872.9 2826.07,2863.58 2836.07,2853.58 2836.07,2843.58 2831.07,2838.58 2826.07,2833.58 2821.07,2833.58 2866.07,2818.58 2876.07,2823.58 2885.19,2822.9 2891.07,2818.58 2895.19,2812.9 2896.07,2803.58 2886.07,2793.58 2880.19,2792.9 2870.19,2797.9 2865.19,2812.9 2690.19,2767.9 2690.19,2717.9 2660.19,2697.9 2661.07,2643.58 2636.07,2618.58 2635.19,2437.9 2635.19,2322.9 2635.19,2272.9 2635.19,2232.9 2665.19,2197.9 2936.07,2193.58 2976.07,2228.58 3041.07,2228.58 3080.19,2177.9 3135.19,2147.9 3205.19,2162.9 3215.19,2212.9
  region net GND: 2815.19,2862.9 2806.07,2853.58 2805.19,2847.9 2806.07,2838.58 2811.07,2833.58 2821.07,2833.58 2866.07,2818.58 2865.19,2807.9 2870.19,2797.9 2695.19,2762.9 2690.19,2767.9 2670.19,2792.9 2600.19,2792.9 2555.19,2832.9 2615.19,2897.9 2630.19,2882.9 2650.19,2882.9 2660.19,2887.9 2660.19,2912.9
  region net GND: 2250.19,2192.9 2180.19,2162.9 2185.19,2162.9 2230.19,2112.9 2235.19,2112.9 2250.19,2102.9 2250.19,2012.9 2230.19,1992.9 2230.19,1927.9 2226.07,1918.58 2220.19,1917.9 2211.07,1918.58 2205.19,1922.9 2200.19,1952.9 2145.19,1917.9 2141.07,1913.58 2151.07,1908.58 2155.19,1902.9 2155.19,1892.9 2235.19,1872.9 2415.19,1872.9 2400.19,1882.9 2395.19,1892.9 2405.19,1902.9 2420.19,1902.9 2430.19,1892.9 2420.19,1872.9 2445.19,1867.9 2495.19,1872.9 2490.19,1942.9 2481.07,1933.58 2456.07,1933.58 2446.07,1943.58 2440.19,1952.9 2440.19,2102.9 2430.19,2112.9 2305.19,2112.9 2290.19,2122.9 2290.19,2132.9
  region net GND: 2826.07,2163.58 2811.07,2153.58 2791.07,2153.58 2801.07,2173.58 2851.07,2173.58

## Silkscreen, mask and mechanical layers (free items; w line width, h text height)
Top Overlay:
  lines w39.37: 1750.19,2317.9 1881.07,2113.58
  lines w39.37 net S$32985: 1735.19,2112.9 1816.07,2213.58
  text "IO|CL" at 2184.3,1658.66 h59.05 r8
Bottom Overlay:
  lines w7.87 net S$46690: 2411.07,1808.58 2791.07,2123.58
  lines w7.87 net S$46694: 2785.19,2127.9 2940.19,2042.9 3165.19,2042.9
  lines w7.87 net S$46698: 2686.07,2178.58 2785.19,2127.9
  lines w7.87 net S$46720: 3015.19,2947.9 2715.19,2697.9 2890.19,2432.9 3200.19,2597.9
  lines w7.87 net S$46732: 1645.19,1907.9 2057.32,1912.73
  lines w7.87 net S$46736: 1805.19,1717.9 2055.19,1717.9 2055.19,1727.9 2057.32,1912.73
  lines w7.87 net S$46740: 1540.19,2112.9 1925.19,2112.9 1925.19,1917.9
  lines w7.87 net S$46744: 1505.19,2387.9 1885.19,2382.9 1888.71,2112.9
  lines w19.68 net S$46640: 2950.19,2062.9 3110.19,2062.9
  lines w19.68 net S$46644: 2950.19,2062.9 2950.19,2142.9 2995.19,2187.9 3060.19,2187.9 3110.19,2137.9 3110.19,2062.9
  lines w78.74 net S$46553: 2130.19,2422.9 2575.19,3127.9
  lines w78.74 net S$46557: 2340.19,2757.9 2565.19,2427.9
  text "BAT+" at 3017.13,2708.72 h59.05 r35
  text "BAT-" at 3082.13,2598.72 h59.05 r35
  text "S+" at 3098.76,2330.51 h59.05
  text "V1.0" at 2421.07,2304.05 h59.05
  text "GND" at 1785.19,2268.38 h59.05
  text "S-" at 3064.48,2200.51 h59.05
  text "VBUS" at 1850.19,2138.38 h59.05
  text "AGND" at 2941.07,2129.05 h59.05
  text "AD0" at 2727.62,2059.09 h59.05 r3
  text "D+" at 1800.19,2003.38 h59.05
  text "AD1" at 2881.07,1984.05 h59.05
  text "D3" at 2626.07,1974.05 h59.05
  text "D-" at 1835.19,1913.38 h59.05
  text "AD2" at 2811.07,1909.05 h59.05
  text "D4" at 2526.07,1899.05 h59.05
  text "D5" at 2661.07,1819.05 h59.05
  text "D6" at 2436.07,1814.05 h59.05
  text "CC1" at 1965.19,1808.38 h59.05
  text "D7" at 2566.07,1739.05 h59.05
  text "CC2" at 2035.19,1718.38 h59.05
  text "D8" at 2581.07,1559.06 h59.05